# EAGLE board Prosthetic_Force_Sensor (EAGLE 9.6.2)
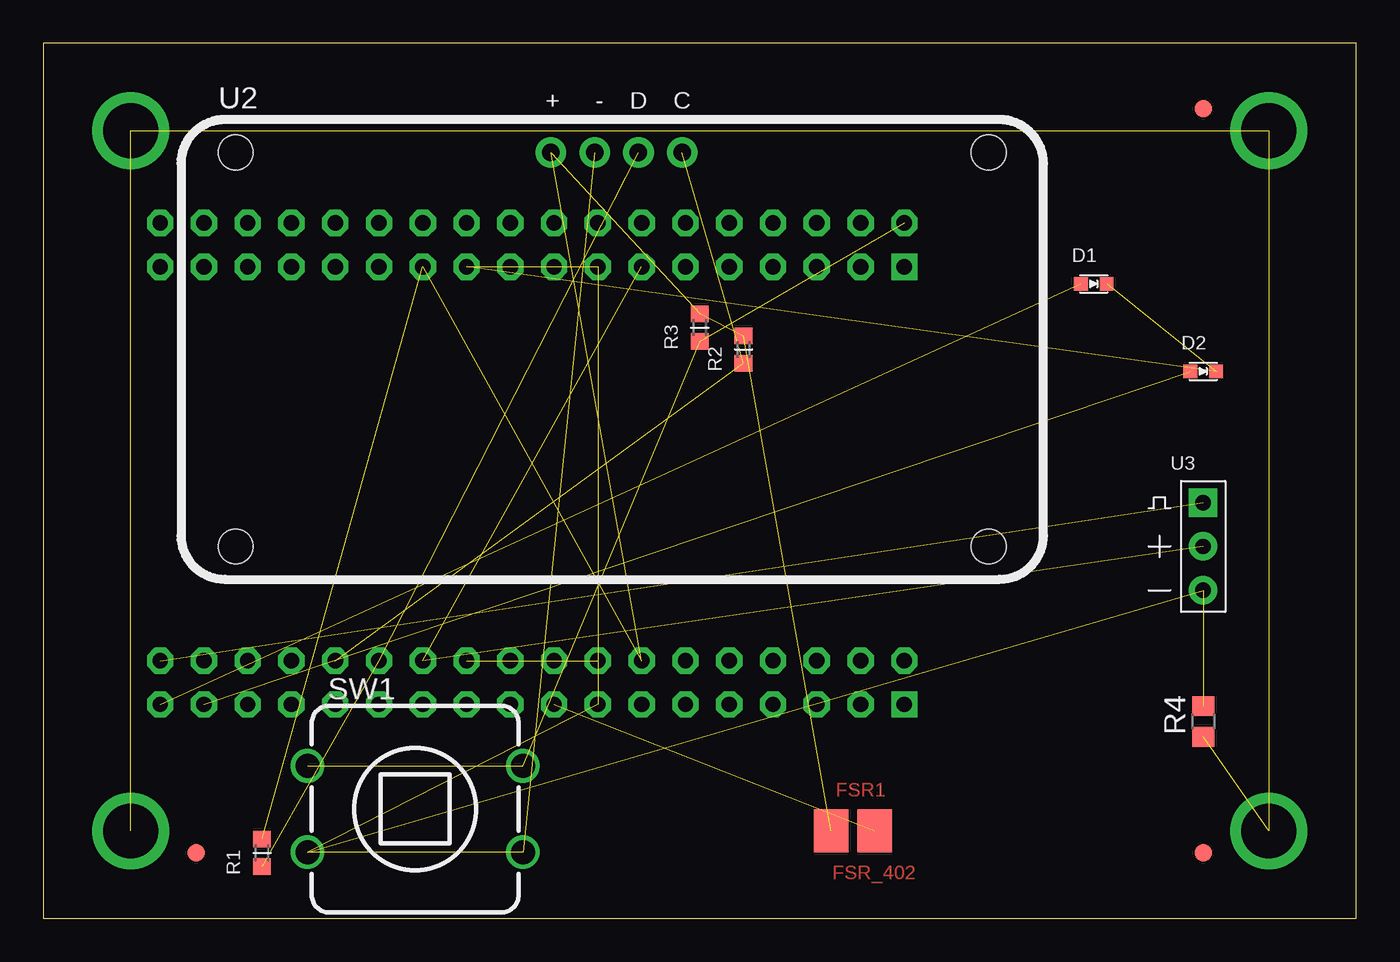
[diagram p0: board, top side]
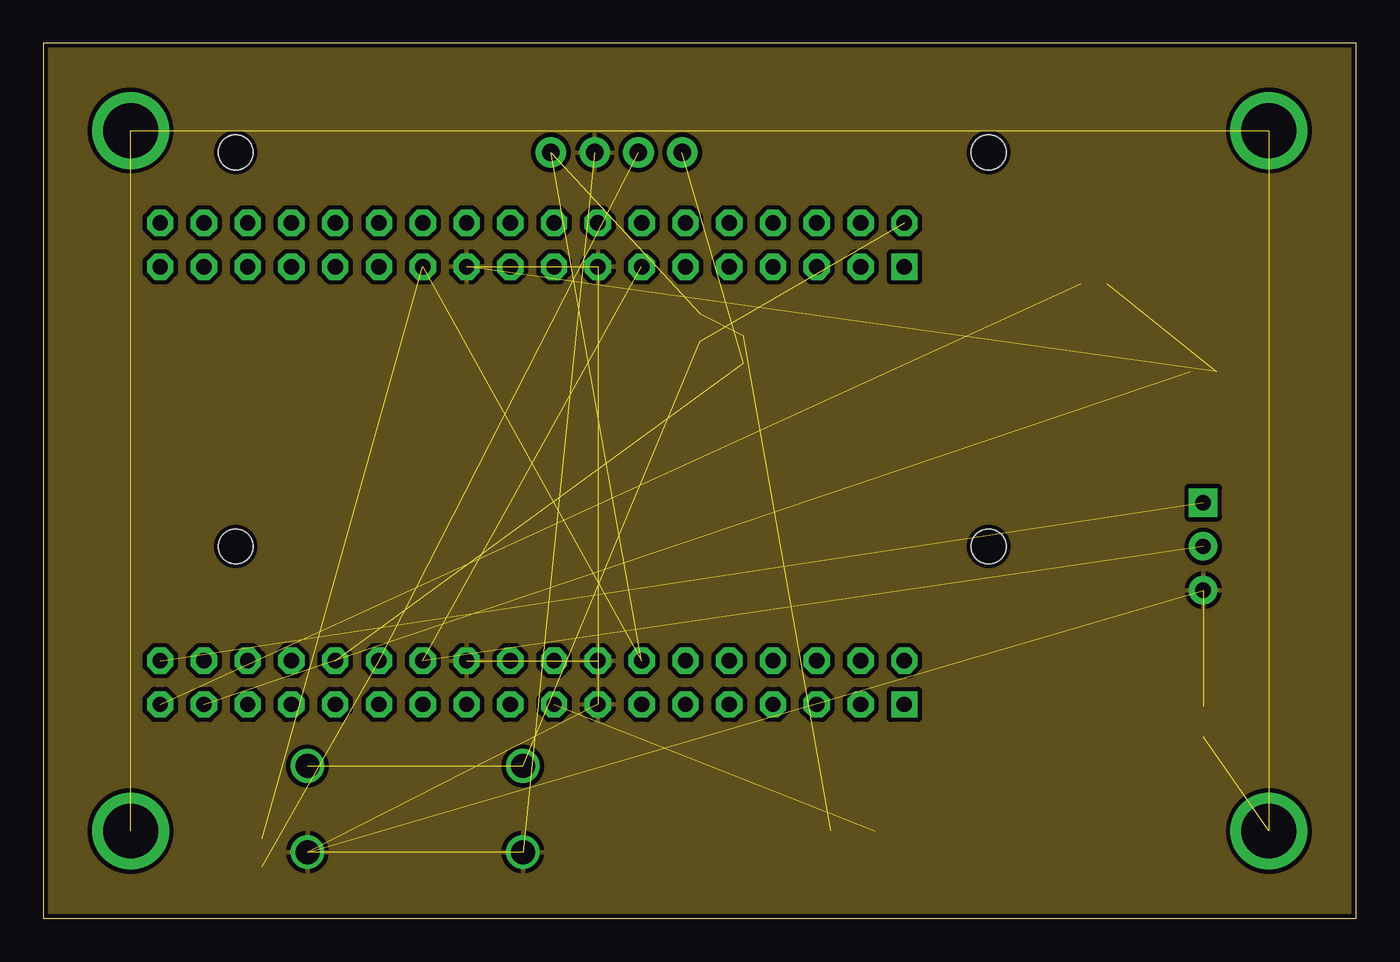
[diagram p1: board, inner layer Route2]
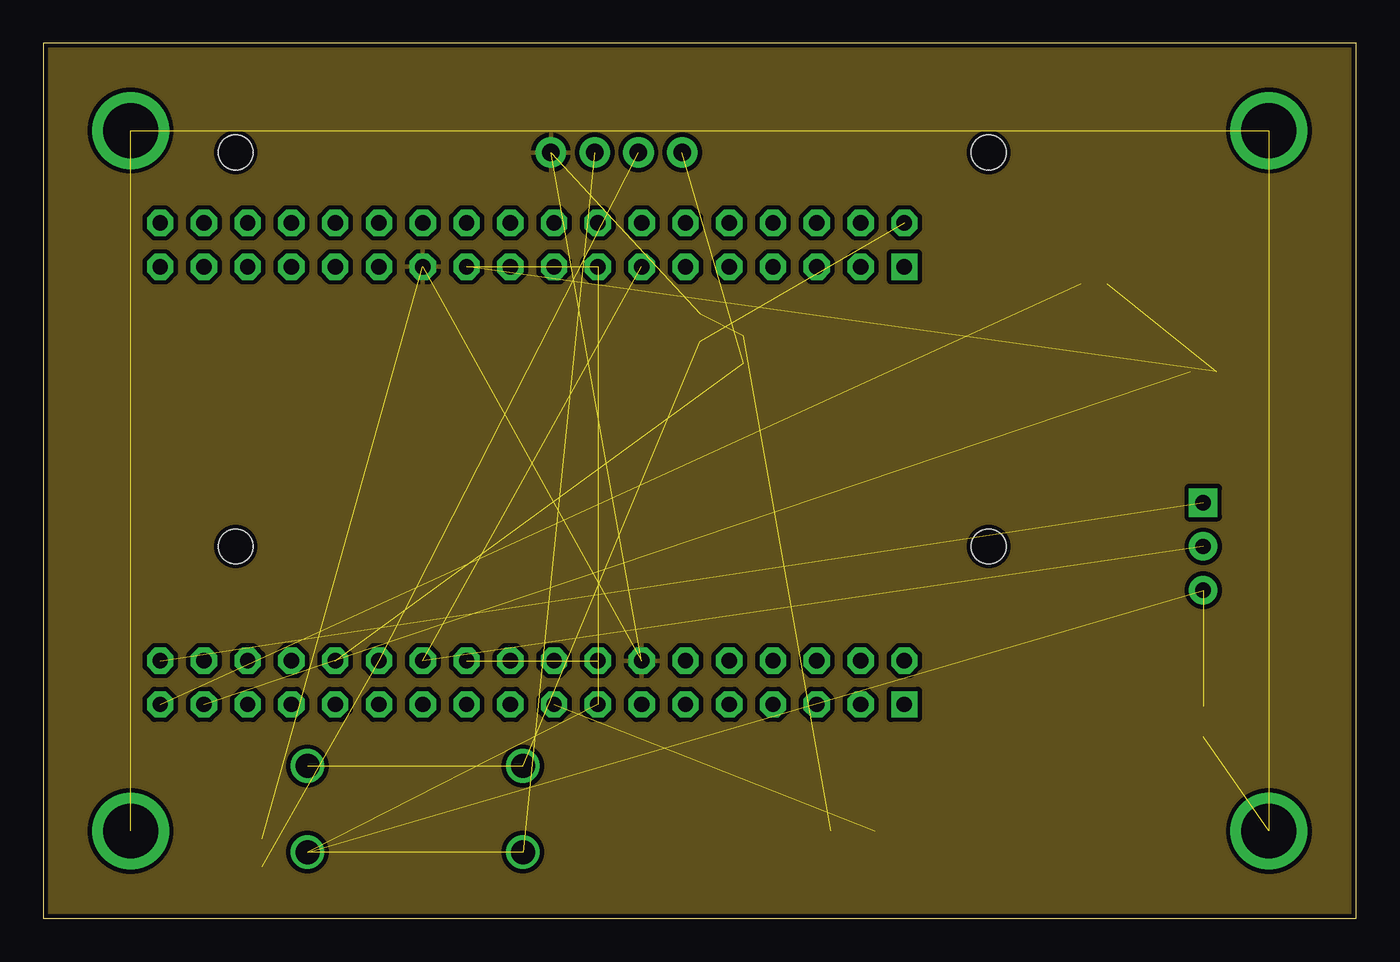
[diagram p2: board, inner layer Route15]
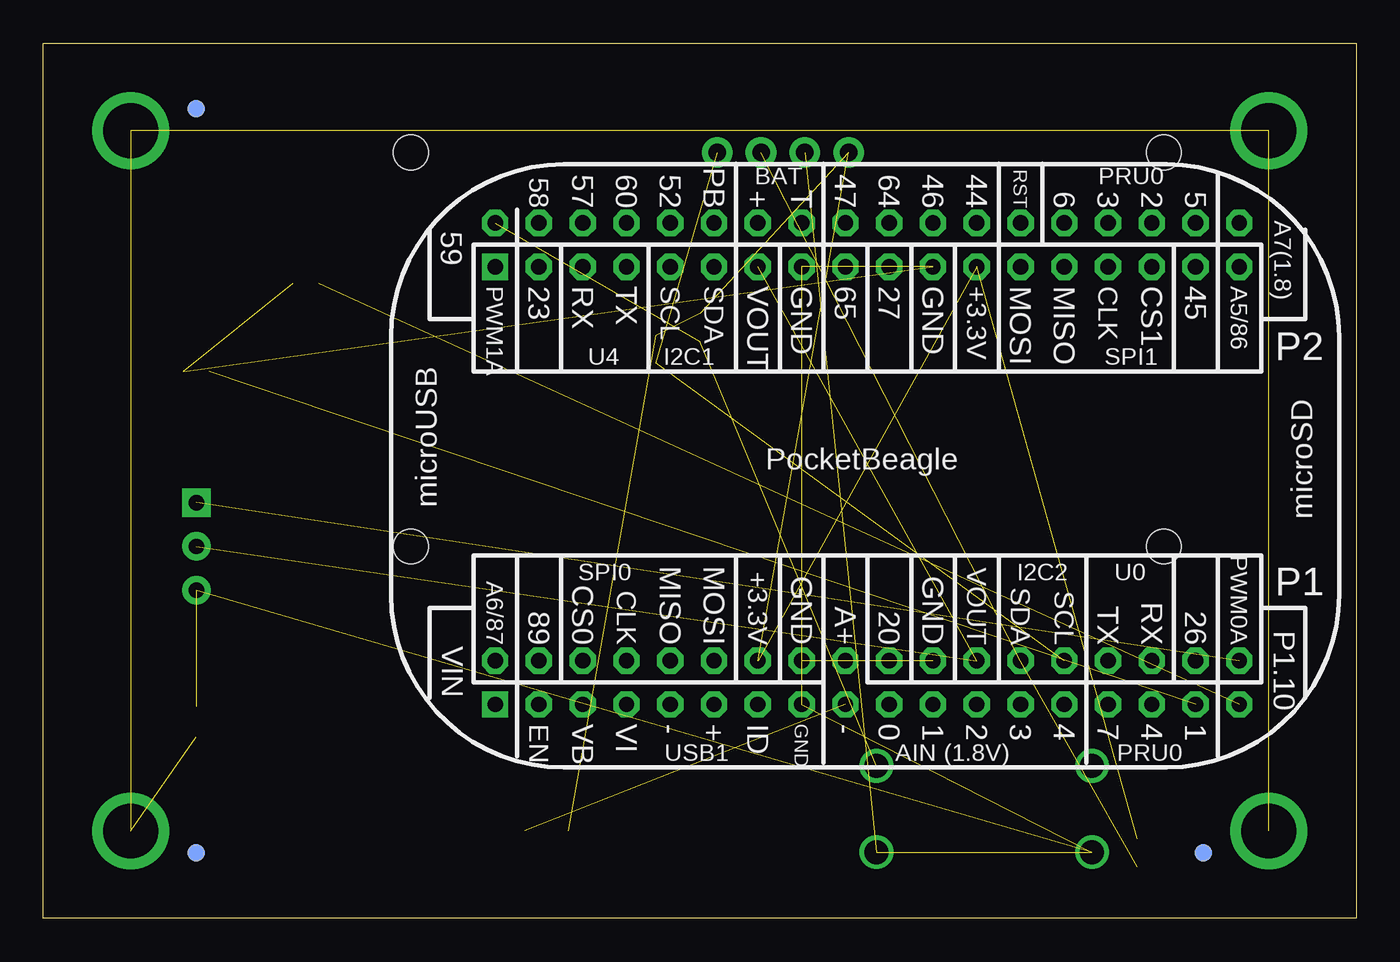
[diagram p3: board, bottom side, seen from below]

Size 76.2 x 50.8 mm. Coordinates in mm from the lower left corner, seen from the top.
Outline: 0,0 76.18,0 76.2,50.8 0,50.8 0,0
Copper layers (1*2*15*16): Top 0.035mm / dielectric 0.23mm / Route2 0.035mm / dielectric 0.93mm / Route15 0.035mm / dielectric 0.23mm / Bottom 0.035mm
Design rules "ENGI301_4lyr": minimum track width 10mil, minimum drill 12mil, track to track 10mil, track to pad 10mil, pad to pad 10mil, via to via 10mil, smd to smd 10mil, copper to edge 10mil, drill to drill 12mil, minimum pad ring 6mil, minimum via ring 6mil, stop-mask expansion 3mil, vias tented up to drill 25mil, thermal gap 10mil

## Footprints (pad centres in the part's own frame; a part is rotated, then mirrored left to right if it is on the bottom)
EIA-STD = smd 0.8 x 0.8: ANODE -0.75,0; CATHODE 0.75,0
FSR_402 = smd 2 x 2.5: 1 -1.27,0; 2 1.27,0
FIDUCIAL_40MIL = smd 1.016 x 1.016: P$1 0,0
MOUNTING_HOLE = drill 3.175 pad 4.445: P$1 0,0
R0603 = smd 0.95 x 1.031: 1 -0.8,0; 2 0.8,0
R0805 = smd 1.143 x 1.27: 1 -0.889,0; 2 0.889,0
BUTTON_12.5MM = drill 1.4: 1 -6.25,2.5; 2 -6.25,-2.5; 3 6.25,2.5; 4 6.25,-2.5
POCKETBEAGLE = drill 0.889 pad 1.524 square: P1_01 5.91,3.53; P2_01 5.91,28.93 | drill 0.889 pad 1.524 octagon: P1_02 5.91,6.07; P1_03 8.45,3.53; P1_04 8.45,6.07; P1_05 10.99,3.53; P1_06 10.99,6.07; P1_07 13.53,3.53; P1_08 13.53,6.07; P1_09 16.07,3.53; P1_10 16.07,6.07; P1_11 18.61,3.53; P1_12 18.61,6.07; P1_13 21.15,3.53; P1_14 21.15,6.07; P1_15 23.69,3.53; P1_16 23.69,6.07; P1_17 26.23,3.53; P1_18 26.23,6.07; P1_19 28.77,3.53; P1_20 28.77,6.07; P1_21 31.31,3.53; P1_22 31.31,6.07; P1_23 33.85,3.53; P1_24 33.85,6.07; P1_25 36.39,3.53; P1_26 36.39,6.07; P1_27 38.93,3.53; P1_28 38.93,6.07; P1_29 41.47,3.53; P1_30 41.47,6.07; P1_31 44.01,3.53; P1_32 44.01,6.07; P1_33 46.55,3.53; P1_34 46.55,6.07; P1_35 49.09,3.53; P1_36 49.09,6.07; P2_02 5.91,31.47; P2_03 8.45,28.93; P2_04 8.45,31.47; P2_05 10.99,28.93; P2_06 10.99,31.47; P2_07 13.53,28.93; P2_08 13.53,31.47; P2_09 16.07,28.93; P2_10 16.07,31.47; P2_11 18.61,28.93; P2_12 18.61,31.47; P2_13 21.15,28.93; P2_14 21.15,31.47; P2_15 23.69,28.93; P2_16 23.69,31.47; P2_17 26.23,28.93; P2_18 26.23,31.47; P2_19 28.77,28.93; P2_20 28.77,31.47; P2_21 31.31,28.93; P2_22 31.31,31.47; P2_23 33.85,28.93; P2_24 33.85,31.47; P2_25 36.39,28.93; P2_26 36.39,31.47; P2_27 38.93,28.93; P2_28 38.93,31.47; P2_29 41.47,28.93; P2_30 41.47,31.47; P2_31 44.01,28.93; P2_32 44.01,31.47; P2_33 46.55,28.93; P2_34 46.55,31.47; P2_35 49.09,28.93; P2_36 49.09,31.47
0.56_HEX_BACKPACK = drill 1.016 pad 1.778: GND -1.016,11.43; SCL 4.064,11.43; SDA 1.524,11.43; VCC -3.556,11.43 | hole 2: -21.844,-11.43; 21.844,-11.43; -21.844,11.43; 21.844,11.43
SERVO-X1 = drill 0.889 pad 1.651: GND 0,-2.54; PWR 0,0 | drill 0.889 pad 1.651 square: SIG 0,2.54

## Placement (x,y rotation side)
D1  RED_LED  [EIA-STD]  60.96,36.83 0 top
D2  GREEN_LED  [EIA-STD]  67.31,31.75 0 top
FSR1  FSR_402  [FSR_402]  46.99,5.08 0 top
FUD1  FIDUCIAL  [FIDUCIAL_40MIL]  8.89,3.81 0 top
FUD2  FIDUCIAL  [FIDUCIAL_40MIL]  67.31,3.81 0 top
FUD3  FIDUCIAL  [FIDUCIAL_40MIL]  67.31,46.99 0 top
FUD4  FIDUCIAL  [FIDUCIAL_40MIL]  67.31,46.99 0 bottom
FUD5  FIDUCIAL  [FIDUCIAL_40MIL]  67.31,3.81 0 bottom
FUD6  FIDUCIAL  [FIDUCIAL_40MIL]  8.89,3.81 0 bottom
MGT1  MOUNTING_HOLE  [MOUNTING_HOLE]  5.08,5.08 0 top
MGT2  MOUNTING_HOLE  [MOUNTING_HOLE]  5.08,45.72 0 top
MGT3  MOUNTING_HOLE  [MOUNTING_HOLE]  71.12,45.72 0 top
MGT4  MOUNTING_HOLE  [MOUNTING_HOLE]  71.12,5.08 0 top
R1  4.7k  [R0603]  12.7,3.81 90 top
R2  4.7k  [R0603]  40.64,33.02 90 top
R3  4.7k  [R0603]  38.1,34.29 90 top
R4  [R0805]  67.31,11.43 90 top
SW1  PUSH_BUTTON  [BUTTON_12.5MM]  21.59,6.35 0 top
U1  POCKETBEAGLE  [POCKETBEAGLE]  55.88,8.89 0 bottom
U2  0.56_HEX_BACKPACK  [0.56_HEX_BACKPACK]  33.02,33.02 0 top
U3  SERVO_SG90  [SERVO-X1]  67.31,21.59 0 top

## Library data of the parts
D1 D2 FSR1 FUD1-FUD6 MGT1-MGT4 R1-R4 SW1 U1-U3 = Prosthetic_Force_Sensor

## Nets
ANA_GND: FSR1.2 U1.P1_17
BAT.VIN: U1.P2_14
BUTTON: R3.1 SW1.1 SW1.3 U1.P2_02
CGND: MGT1.P$1 MGT2.P$1 MGT3.P$1 MGT4.P$1 R4.1
FSR: U1.P1_27
GND: D1.CATHODE D2.CATHODE R4.2 SW1.2 SW1.4 U1.P1_15 U1.P1_16 U1.P1_22 U1.P2_15 U1.P2_21 U2.GND U3.GND
GREEN_LED: D2.ANODE U1.P1_33
I2C_SCL: R2.1 U1.P1_28 U2.SCL
I2C_SDA: R1.1 U1.P1_26 U2.SDA
RED_LED: D1.ANODE U1.P1_35
SERVO: U1.P1_36 U3.SIG
VDD_1P8V: U1.P1_18
VDD_3P3V: FSR1.1 R1.2 R2.2 R3.2 U1.P1_14 U1.P2_23 U2.VCC
VDD_5V: U1.P1_24 U1.P2_13 U3.PWR
VIN: U1.P1_01

## Tracks (layer width: path | path; a pad name or v marks a point on that pad's centre or on a via)
ANA_GND  (1 unrouted)
BUTTON  (3 unrouted)
CGND  (4 unrouted)
GND  (11 unrouted)
  pour Route2 (rank 6): -5.08,-2.54 -5.08,55.88 81.28,55.88 81.28,-2.54
GREEN_LED  (1 unrouted)
I2C_SCL  (2 unrouted)
I2C_SDA  (2 unrouted)
RED_LED  (1 unrouted)
SERVO  (1 unrouted)
VDD_3P3V  (6 unrouted)
  pour Route15 (rank 6): -10.16,-5.08 -10.16,60.96 83.82,60.96 83.82,-5.08
VDD_5V  (2 unrouted)